# EAGLE board exemplo (EAGLE 9.7.0)

Size 190.05 x 117.72 mm. Coordinates in mm from the lower left corner, seen from the top.
Outline: 0,0 190.05,0 190.05,117.72 0,117.72 0,0
Copper layers (1*16): Top 0.035mm / dielectric 1.5mm / Bottom 0.035mm
Design rules "default": minimum track width 6mil, minimum drill 0.35mm, track to track 6mil, track to pad 6mil, pad to pad 6mil, via to via 6mil, smd to smd 6mil, copper to edge 40mil, drill to drill 6mil, minimum pad ring 10mil, minimum via ring 8mil, stop-mask expansion 4mil, vias tented up to drill 0mil, thermal gap 10mil

## Footprints (pad centres in the part's own frame; a part is rotated, then mirrored left to right if it is on the bottom)
LEDRD254W60D565H860B = drill 0.981 pad 1.581: 1 -1.27,0; 2 1.27,0
LEDRD254W60D565H860B_Y = drill 0.981 pad 1.581: 1 -1.27,0; 2 1.27,0
LEDRD254W60D565H860B_G = drill 0.981 pad 1.581: 1 -1.27,0; 2 1.27,0
LEDRD254W60D565H860B_W = drill 0.981 pad 1.581: 1 -1.27,0; 2 1.27,0
LEDRD254W60D565H860B_O = drill 0.981 pad 1.581: 1 -1.27,0; 2 1.27,0
7SEG-13 = drill 0.813 long: 1 -5.08,-7.62; 2 -2.54,-7.62; 3 0,-7.62; 4 2.54,-7.62; 5 5.08,-7.62; 6 5.08,7.62; 7 2.54,7.62; 8 0,7.62; 9 -2.54,7.62; 10 -5.08,7.62
PIEZO = drill 1 pad 1.6: 1 -3.5,0; 2 3.5,0
RESAD1016W63L850D250B = drill 0.83 pad 1.43: 1 -5.08,0; 2 5.08,0
GL5528 = drill 0.8 pad 1.4: 1 -1.702,0; 2 1.702,0
HA-06-SM065 = drill 1 pad 1.676: 1 -2.54,-2.54; 2 0,2.54; 3 2.54,-2.54
SWITCH-MOMENTARY-PTH-6.5MM = drill 1.016 pad 1.88: 1 -3.251,2.261; 2 3.251,2.261; 3 -3.251,-2.261; 4 3.251,-2.261
ARDUINO-UNO-R3-SHIELD = drill 1.016 pad 1.88: 3.3V 24.13,-2.54; 5V 24.13,0; A0 24.13,12.7; A1 24.13,15.24; A2 24.13,17.78; A3 24.13,20.32; A4 24.13,22.86; A5 24.13,25.4; AREF -24.13,-13.97; D2 -24.13,20.32; D3 -24.13,17.78; D4 -24.13,15.24; D5 -24.13,12.7; D6 -24.13,10.16; D7 -24.13,7.62; D8 -24.13,3.81; D9 -24.13,1.27; D10 -24.13,-1.27; D11 -24.13,-3.81; D12 -24.13,-6.35; D13 -24.13,-8.89; GND@0 24.13,2.54; GND@1 24.13,5.08; GND@2 -24.13,-11.43; IOREF 24.13,-7.62; NC 24.13,-10.16; RES 24.13,-5.08; RX -24.13,25.4; SCL -24.13,-19.05; SDA -24.13,-16.51; TX -24.13,22.86; VIN 24.13,7.62
DIP762W53P254L1969H508Q16B = drill 0.743 pad 1.343: 1 -3.81,8.89; 2 -3.81,6.35; 3 -3.81,3.81; 4 -3.81,1.27; 5 -3.81,-1.27; 6 -3.81,-3.81; 7 -3.81,-6.35; 8 -3.81,-8.89; 9 3.81,-8.89; 10 3.81,-6.35; 11 3.81,-3.81; 12 3.81,-1.27; 13 3.81,1.27; 14 3.81,3.81; 15 3.81,6.35; 16 3.81,8.89

## Placement (x,y rotation side)
D1  RED  [LEDRD254W60D565H860B]  158.59,84.08 0 top
D2  YELLOW  [LEDRD254W60D565H860B_Y]  171.29,84.08 0 top
D3  GREEN  [LEDRD254W60D565H860B_G]  183.99,84.08 0 top
D4  WHITE  [LEDRD254W60D565H860B_W]  128.11,81.54 0 top
D5  ORANGE  [LEDRD254W60D565H860B_O]  148.43,81.54 0 top
DIGIT1  7SEG-CK  [7SEG-13]  64.61,24.21 0 top
PIEZO1  PIEZO  [PIEZO]  86.2,19.13 0 top
R1  1k  [RESAD1016W63L850D250B]  64.61,8.97 90 top
R2  220  [RESAD1016W63L850D250B]  116.68,71.38 90 top
R3  PHOTOCELL_GL5528  [GL5528]  138.27,96.78 0 top
R4  10k  [RESAD1016W63L850D250B]  137,104.4 90 top
R5  156  [RESAD1016W63L850D250B]  182.72,89.16 90 top
R6  156  [RESAD1016W63L850D250B]  170.02,89.16 90 top
R7  156  [RESAD1016W63L850D250B]  157.32,89.16 90 top
R8  156  [RESAD1016W63L850D250B]  126.84,89.16 90 top
R10  156  [RESAD1016W63L850D250B]  147.16,89.16 90 top
RPOT1  250k  [HA-06-SM065]  139.54,79 0 top
S1  SWITCH_MOMENTARY  [SWITCH-MOMENTARY-PTH-6.5MM]  119.22,87.89 90 top
U1  ARDUINO-UNO-R3-SHIELD  [ARDUINO-UNO-R3-SHIELD]  47.88,87.87 270 top
U2  74HC595_PDIP  [DIP762W53P254L1969H508Q16B]  35.4,25.48 90 top

## Library data of the parts
D1 = Tinkercad; CATEGORY: Opto-Electronic; SUB-CATEGORY: LED; VALUE: LED_RED
D2 = Tinkercad; CATEGORY: Opto-Electronic; SUB-CATEGORY: LED; VALUE: LED_YELLOW
D3 = Tinkercad; CATEGORY: Opto-Electronic; SUB-CATEGORY: LED; VALUE: LED_GREEN
D4 = Tinkercad; CATEGORY: Opto-Electronic; SUB-CATEGORY: LED; VALUE: LED_WHITE
D5 = Tinkercad; CATEGORY: Opto-Electronic; SUB-CATEGORY: LED; VALUE: LED_ORANGE
DIGIT1 = Tinkercad; CATEGORY: Opto-Electronic; SUB-CATEGORY: Display; TYPE: 7-Segment
PIEZO1 R1-R8 R10 RPOT1 S1 U1 U2 = Tinkercad

## Nets
D1_A: D1.1 R7.1
D2_A: D2.1 R6.1
D3_A: D3.1 R5.1
D4_A: D4.1 R8.1
D5_A: D5.1 R10.1
DIGIT1_CK1: DIGIT1.3 R1.2
R4_2: R3.2 R4.2
U1_5V: RPOT1.3 S1.3 S1.4 U1.5V U2.10 U2.16
U1_A3: R3.1 R4.1 U1.A3
U1_A5: RPOT1.2 U1.A5
U1_D2: R2.2 S1.1 S1.2 U1.D2
U1_D3: R7.2 U1.D3
U1_D4: R6.2 U1.D4
U1_D5: R5.2 U1.D5
U1_D6: R10.2 U1.D6
U1_D7: R8.2 U1.D7
U1_D8: PIEZO1.1 U1.D8
U1_D9: U1.D9 U2.11
U1_D10: U1.D10 U2.12
U1_D11: U1.D11 U2.14
U1_GND: D1.2 D2.2 D3.2 D4.2 D5.2 PIEZO1.2 R1.1 R2.1 RPOT1.1 U1.GND@0 U1.GND@1 U1.GND@2 U2.8 U2.13
U2_Q0: DIGIT1.10 U2.15
U2_Q1: DIGIT1.9 U2.1
U2_Q2: DIGIT1.7 U2.2
U2_Q3: DIGIT1.6 U2.3
U2_Q4: DIGIT1.4 U2.4
U2_Q5: DIGIT1.2 U2.5
U2_Q6: DIGIT1.1 U2.6

## Tracks (layer width: path | path; a pad name or v marks a point on that pad's centre or on a via)
D1_A  (1 unrouted)
D2_A  (1 unrouted)
D3_A  (1 unrouted)
D4_A  (1 unrouted)
D5_A  (1 unrouted)
DIGIT1_CK1  (1 unrouted)
R4_2  (1 unrouted)
U1_5V  (5 unrouted)
U1_A3  (2 unrouted)
U1_A5  (1 unrouted)
U1_D2  (3 unrouted)
U1_D3  (1 unrouted)
U1_D4  (1 unrouted)
U1_D5  (1 unrouted)
U1_D6  (1 unrouted)
U1_D7  (1 unrouted)
U1_D8  (1 unrouted)
U1_D9  (1 unrouted)
U1_D10  (1 unrouted)
U1_D11  (1 unrouted)
U1_GND  (13 unrouted)
U2_Q0  (1 unrouted)
U2_Q1  (1 unrouted)
U2_Q2  (1 unrouted)
U2_Q3  (1 unrouted)
U2_Q4  (1 unrouted)
U2_Q5  (1 unrouted)
U2_Q6  (1 unrouted)